# EAGLE board FD Capacitance Sensor v11 (EAGLE 9.5.2)
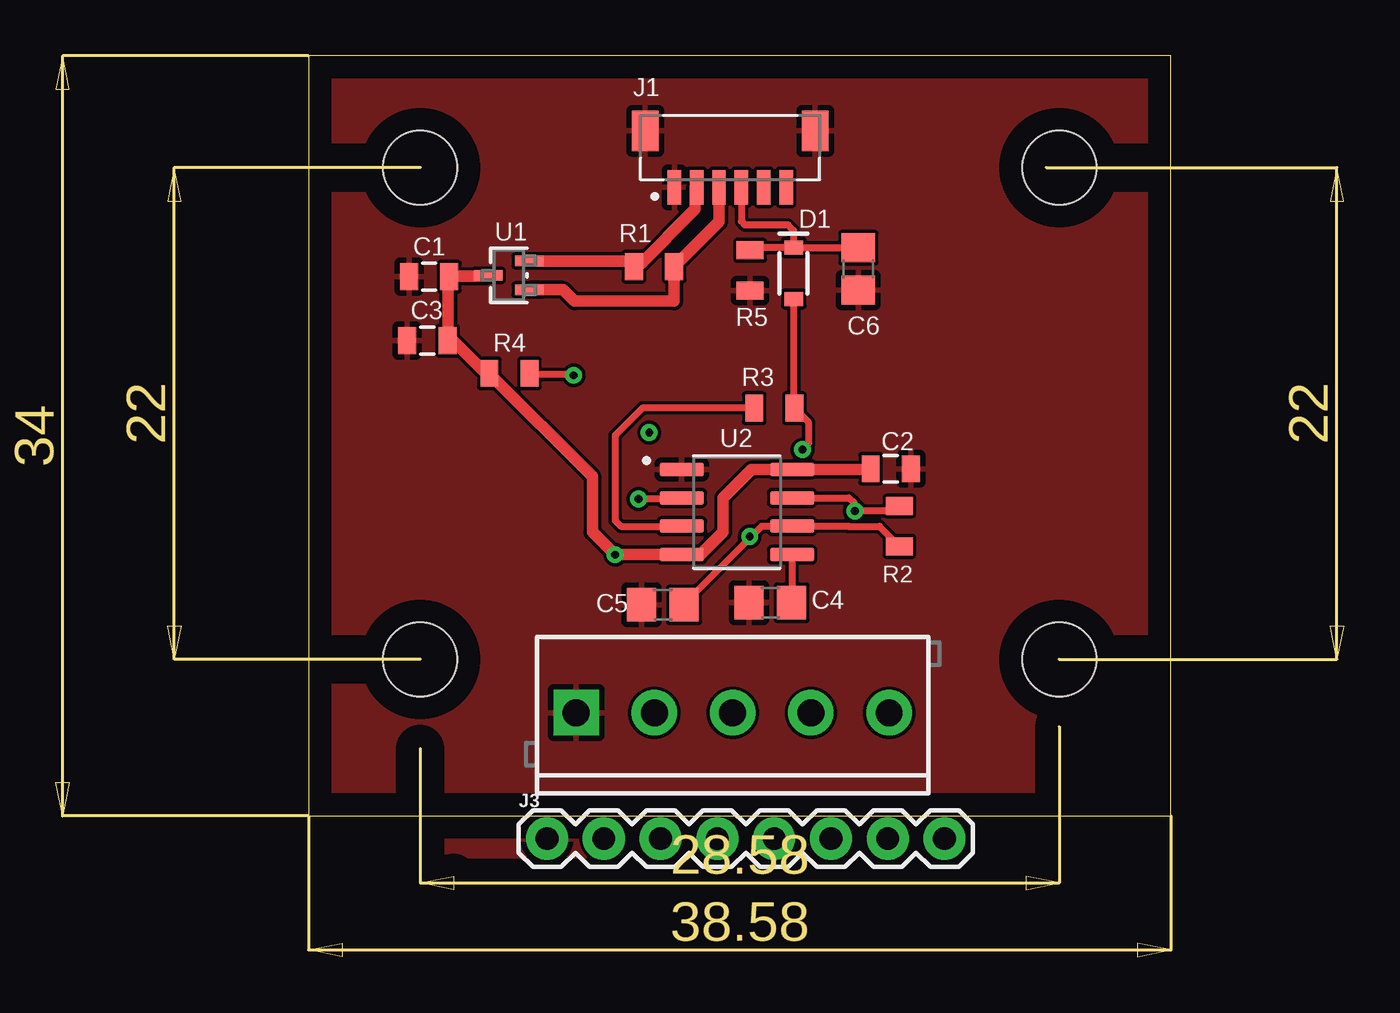
[diagram p0: board, top side]
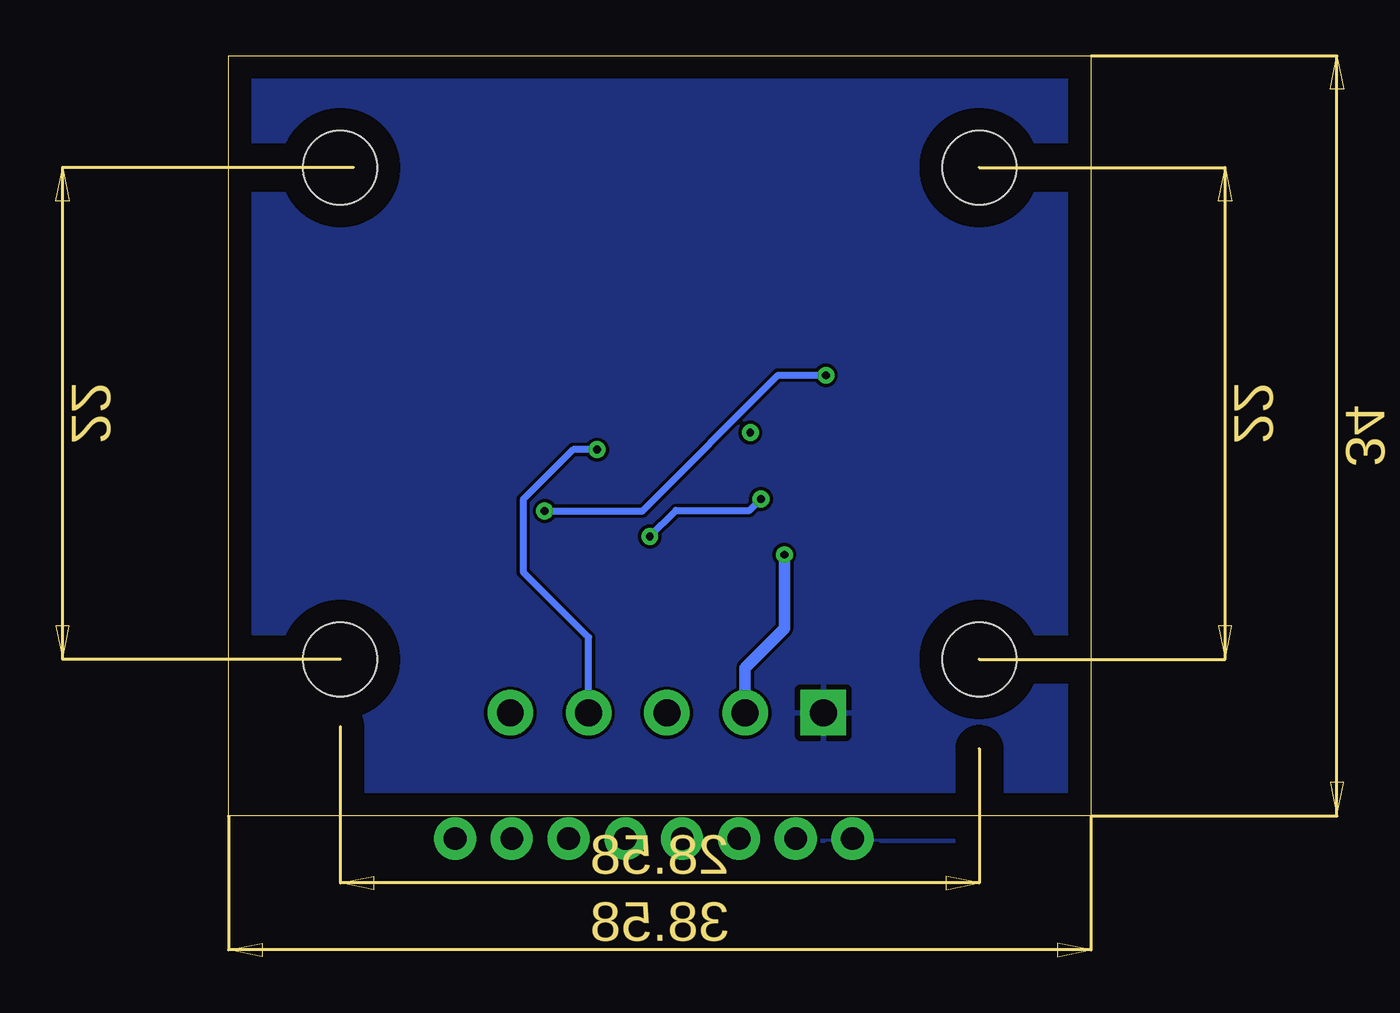
[diagram p1: board, bottom side, seen from below]

Size 38.58 x 34 mm. Coordinates in mm from the lower left corner, seen from the top.
Outline: 0,0 38.58,0 38.58,34 0,34 0,0
Copper layers (1*16): Top 0.035mm / dielectric 1.5mm / Bottom 0.035mm
Design rules "default": minimum track width 6mil, minimum drill 0.35mm, track to track 6mil, track to pad 6mil, pad to pad 6mil, via to via 6mil, smd to smd 6mil, copper to edge 40mil, drill to drill 6mil, minimum pad ring 10mil, minimum via ring 8mil, stop-mask expansion 4mil, vias tented up to drill 0mil, thermal gap 10mil

## Footprints (pad centres in the part's own frame; a part is rotated, then mirrored left to right if it is on the bottom)
0805@1 = smd 0.8 x 1.2: 1 -0.9,0; 2 0.9,0
C0805 = smd 1.3 x 1.5: 1 -0.95,0; 2 0.95,0
SOD-323 = smd 0.63 x 0.83: A 1.15,0; C -1.15,0
JST_BM06B-SRSS-TB(LF)(SN) = smd 0.6 x 1.55: 1 -2.5,-2.525; 2 -1.5,-2.525; 3 -0.5,-2.525; 4 0.5,-2.525; 5 1.5,-2.525; 6 2.5,-2.525 | smd 1.2 x 1.8: S1 -3.8,0; S2 3.8,0
SCREWTERMINAL-3.5MM-5 = drill 1.2 pad 2.032 square: 1 0,0 | drill 1.2 pad 2.032: 2 3.5,0; 3 7,0; 4 10.5,0; 5 14,0
1X08 = drill 1.016 pad 1.88: 1 0,0; 2 2.54,0; 3 5.08,0; 4 7.62,0; 5 10.16,0; 6 12.7,0; 7 15.24,0; 8 17.78,0
0805 = smd 0.8 x 1.2: 1 -0.9,0; 2 0.9,0
SOT_101PT1_ONS = smd 0.457 x 1.27: 1 -0.65,-0.914; 2 0.65,-0.914; 3 0,0.914
SOIC127P599X175-8N = smd 1.97 x 0.6: 1 -2.47,1.905; 2 -2.47,0.635; 3 -2.47,-0.635; 4 -2.47,-1.905; 5 2.47,-1.905; 6 2.47,-0.635; 7 2.47,0.635; 8 2.47,1.905
STAND-OFF = hole 3.302: 0,0

## Placement (x,y rotation side)
C1  0.1uF  [0805@1]  5.39,24.12 180 top
C2  1uF  [0805@1]  26.04,15.53 0 top
C3  10nF  [0805@1]  5.32,21.27 180 top
C4  10nf  [C0805]  20.66,9.54 0 top
C5  470pf  [C0805]  15.85,9.44 0 top
C6  1uF  [C0805]  24.59,24.46 90 top
D1  250mA/100V  [SOD-323]  21.7,24.27 270 top
J1  BM06B-SRSS-TBT(LF)(SN)  [JST_BM06B-SRSS-TB(LF)(SN)]  18.86,30.65 0 top
J2  [SCREWTERMINAL-3.5MM-5]  11.97,4.61 0 top
J3  [1X08]  10.67,-1.02 0 top
R1  100k  [0805]  15.45,24.57 180 top
R2  1k  [0805]  26.43,12.96 90 top
R3  10k  [0805]  20.84,18.24 0 top
R4  330  [0805]  8.99,19.8 180 top
R5  1M  [0805]  19.75,24.4 90 top
U1  NTS4101PT1  [SOT_101PT1_ONS]  8.96,24.18 90 top
U2  TLC555CD  [SOIC127P599X175-8N]  19.16,13.59 0 top
U$1  STAND-OFF  [STAND-OFF]  5,7 0 top
U$2  STAND-OFF  [STAND-OFF]  5,29 0 top
U$3  STAND-OFF  [STAND-OFF]  33.58,29 0 top
U$4  STAND-OFF  [STAND-OFF]  33.58,7 0 top

## Library data of the parts
C1 = Custom Components; HOUSEPART: YES; MPN: MF-CAP-0805-0.1uF; POPULATE: 1; URL: https://factory.macrofab.com/part/MF-CAP-0805-0.1uF
C2 = Custom Components; HOUSEPART: yes; MPN: MF-CAP-0805-1uF; POPULATE: 1; URL: https://factory.macrofab.com/part/MF-CAP-0805-1uF
C3 = Custom Components; DIGIKEY: 399-C0805X103K1RAC3316CT-ND; HOUSEPART: NO; MPN: C0805X103K1RAC3316; POPULATE: 1; URL: https://www.digikey.com/en/products/detail/kemet/C0805X103K1RAC3316/10315780
C4-C6 = rcl; SPICEPREFIX: C
D1 = Custom Components; MPN: BAS16HT1G
J1 = Custom Components; MPN: BM06B-SRSS-TBT(LF)(SN); POPULATE: 1
J2 = SparkFun-Connectors; PROD_ID: Combine 8288+8399
J3 = SparkFun-Connectors; PROD_ID: CONN-08438
R1 = Custom Components; MPN: MF-RES-0805-100K; POPULATE: 1; URL: https://factory.macrofab.com/part/MF-RES-0805-100K
R2 R5 = Custom Components; HOUSEPART: YES; MPN: MF-RES-0805-1K; POPULATE: 1; URL: https://factory.macrofab.com/part/MF-RES-0805-1k
R3 = Custom Components; MPN: MF-RES-0805-10K; POPULATE: 1; URL: https://factory.macrofab.com/part/MF-RES-0805-10K
R4 = Custom Components; HOUSEPART: YES; MPN: MF-RES-0805-330; POPULATE: 1
U1 = Custom Components; DATASHEET: https://datasheet.octopart.com/NTS4101PT1-ON-Semiconductor-datasheet-139013286.pdf; MANUFACTURER_PART_NUMBER: NTS4101PT1; SOURCELIBRARY: ON_Semiconductor_2020-03-06; VENDOR: ON Semiconductor
U2 = Custom Components; DESCRIPTION: 2.1-MHz, 250-A, Low-Power Timer 8-SOIC 0 to 70; DIGI-KEY_PART_NUMBER: 296-52992-ND; MF: Texas Instruments; MP: TLC555CD; PACKAGE: SOIC-8 Texas Instruments; PURCHASE-URL: https://pricing.snapeda.com/search/part/TLC555CD/?ref=eda
U$1-U$4 = SparkFun-Hardware

## Nets
!EN: J1.3 R1.1 U1.1
+3V3: J1.2 R1.2 U1.2
GND: C1.2 C2.2 C3.2 C4.1 C5.1 C6.1 J1.1 J1.S1 J1.S2 J2.1 J3.1 R5.1 U2.1
N$1: C4.2 U2.5
N$2: J3.3
N$3: J3.4
N$4: J3.2
N$5: R3.1 U2.3
N$7: J3.5
N$8: C5.2 R2.1 U2.2 U2.6
N$9: R2.2 R4.1 U2.7
NC: J1.6
OUTPUT1: C6.2 D1.C J1.4 R5.2
OUTPUT2: J1.5
SENSOR1: D1.A J2.4 R3.2
SENSOR2: J2.5
SHEILD: J2.3
VCC [VCC]: C1.1 C2.1 C3.1 J2.2 R4.2 U1.3 U2.4 U2.8

## Tracks (layer width: path | path; a pad name or v marks a point on that pad's centre or on a via)
!EN
  Top 0.508: J1.3 18.36,26.58 R1.1 16.35,23.02 11.9,23.02 11.39,23.53 U1.1
+3V3
  Top 0.152: 14.48,24.56 R1.2 14.73,24.57 | 17.3,28.12 J1.2
  Top 0.508: 17.3,28.12 17.3,27.14 14.73,24.57 | R1.2 14.3,24.82 U1.2
GND
  pour Top: -2.49,-1.97 -2.49,41.67 40.82,41.67 40.82,-1.97
  pour Bottom: -1.42,-1.13 -1.42,41.03 40.03,41.03 40.03,-1.13
N$1
  Top 0.305: U2.5 21.63,9.56
  Top 0.508: 21.63,9.56 C4.2
N$5
  Top 0.305: R3.1 14.94,18.24 13.72,17.02 13.72,13.21 13.97,12.95 U2.3
  Top 0.508: U2.3
N$8  (via drill 0.35)
  Top 0.152: 21.57,12.95 U2.6 | U2.2 16.63,14.17 | v19.74,12.5 19.77,12.46
  Top 0.305: 21.57,12.95 20.27,12.95 19.77,12.46 16.8,9.48 | 16.63,14.17 v14.76,14.17 | U2.6 24.15,12.96 25.54,12.96 R2.1
  Top 0.508: C5.2 16.8,9.48
  Bottom 0.305: v19.74,12.5 18.57,13.66 15.27,13.66 v14.76,14.17
N$9  (via drill 0.35)
  Top 0.152: v11.86,19.71 11.84,19.74 | 9.91,19.74 R4.1 | R2.2 26.21,13.64
  Top 0.305: 11.84,19.74 9.91,19.74 | U2.7 24.17,14.23 24.43,13.97 v24.43,13.64 26.21,13.64
  Bottom 0.305: v24.43,13.64 20.07,13.64 13.99,19.71 v11.86,19.71
N$23  (via drill 0.35)
  other vias: 15.24,17.14
OUTPUT1
  Top 0.305: J1.4 19.36,26.6 19.52,26.44 21.45,26.44 21.7,26.18 D1.C | R5.2 19.87,25.42 D1.C | D1.C 24.59,25.42 C6.2
SENSOR1  (via drill 0.35)
  Top 0.152: 21.72,23.09 D1.A | 21.72,18.29 R3.2 21.79,18.21
  Top 0.305: 21.72,18.29 21.72,23.09 | R3.2 22.35,17.62 22.35,16.64 v22.1,16.38
  Bottom 0.305: v22.1,16.38 23.17,16.38 25.4,14.15 25.4,10.92 22.47,7.99 J2.4
VCC  (via drill 0.35)
  Top 0.152: 6.25,21.34 C3.1 6.33,21.34 6.4,21.34 | 6.25,24.08 C1.1 6.33,24.16 | 7.92,19.81 8.08,19.81 R4.2 | 8,24.16 U1.3 | 21.64,15.54 U2.8 | 16.69,11.73 U2.4
  Top 0.305: v13.72,11.68 13.77,11.73
  Top 0.508: 6.25,24.08 6.25,21.34 | 6.4,21.34 7.92,19.81 | 6.33,24.16 8,24.16 | R4.2 12.7,15.19 12.7,12.7 v13.72,11.68 U2.4 | U2.4 | U2.4 17.53,11.68 18.54,12.7 18.54,14.22 19.81,15.49 U2.8 25.12,15.5 C2.1
  Bottom 0.508: v13.72,11.68 13.72,8.38 15.47,6.63 J2.2